# Altium PCB PCB1.PcbDoc
Units mil, origin at the board's own origin, x right, y up, seen from the top; angles counter-clockwise.
Board outline 6000 x 4000 mil, 2 copper layers (Top Layer, Bottom Layer); 76 components, 64 nets, 176 pads, 0 vias.
Unrouted connection lines stored in the file: 99.
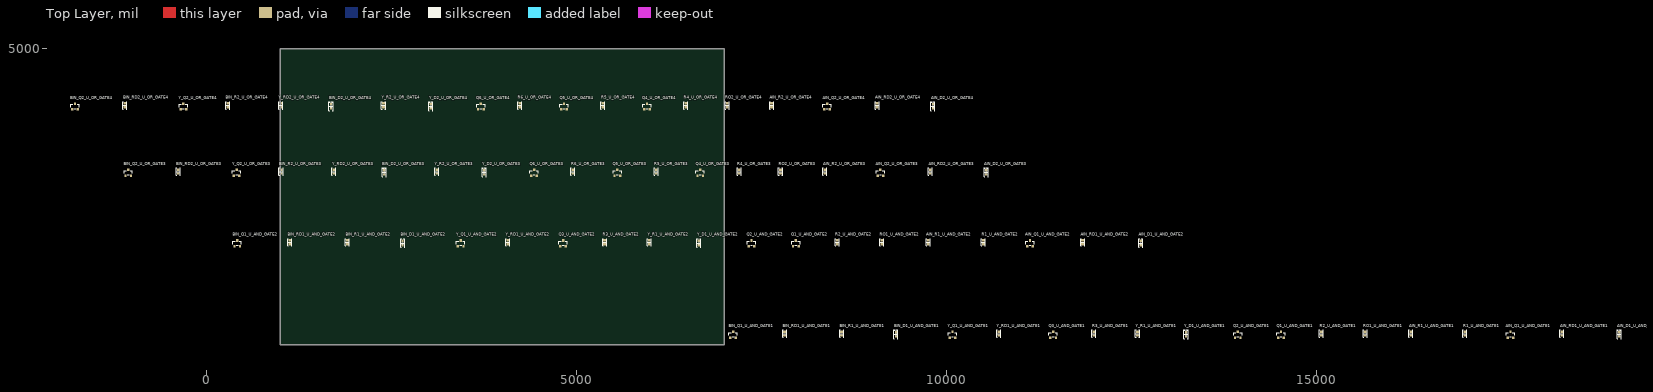
[diagram p0: Top Layer view]
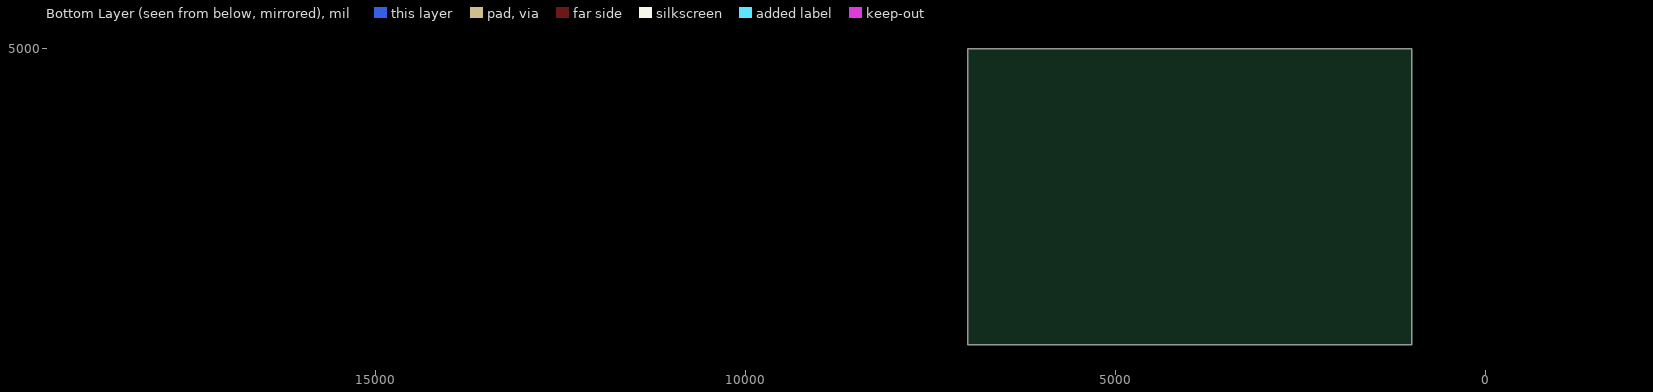
[diagram p1: Bottom Layer view, seen from below]

## Layer stack, top to bottom
Top Solder: solder mask 0.4, Solder Resist, Dk 3.5
Top Layer: signal copper 1.4
Dielectric 1: dielectric 12.6, FR-4, Dk 4.8
Bottom Layer: signal copper 1.4
Bottom Solder: solder mask 0.4, Solder Resist, Dk 3.5

## Board outline
1000,1000 7000,1000 7000,5000 1000,5000

## Design rules (kind name [scope] priority, off if disabled: settings)
Clearance [All] p1: gap=10 ignorepadtopadclearanceinfootprint=FALSE except(0: Arc-Hole Track-Hole SMDPad-Hole THPad-Hole Via-Hole Fill-Hole Poly-Hole Region-Hole Text-Hole)
PolygonConnect [All] p1: connectstyle=Relief reliefconductorwidth=10 reliefentries=4 polygonreliefangle="90 Angle" airgapwidth=10
RoomDefinition U_OR_GATE4 [InComponentClass('U_OR_GATE4')] p1: confinementstyle=ConfineIn formatcopy=TRUE lockcomponents=FALSE outline -1850,4144.53 10460,4144.53 10460,4374.53 -1850,4374.53
RoomDefinition U_OR_GATE3 [InComponentClass('U_OR_GATE3')] p2: confinementstyle=ConfineIn formatcopy=TRUE lockcomponents=FALSE outline -1130,3249.41 11180,3249.41 11180,3479.41 -1130,3479.41
RoomDefinition U_AND_GATE2 [InComponentClass('U_AND_GATE2')] p3: confinementstyle=ConfineIn formatcopy=TRUE lockcomponents=FALSE outline 342.4,2294.37 13297.4,2294.37 13297.4,2524.37 342.4,2524.37
RoomDefinition U_AND_GATE1 [InComponentClass('U_AND_GATE1')] p4: confinementstyle=ConfineIn formatcopy=TRUE lockcomponents=FALSE outline 7045,1060 19755,1060 19755,1290 7045,1290
RoutingVias [All] p1: holewidth=28 width=50 viastyle="Through Hole" minholewidth=28 minwidth=50 maxholewidth=28 maxwidth=50
SolderMaskExpansion [All] p1: expansion=4
Width [All] p1: maxlimit=10 minlimit=10 preferedwidth=10
30 further rules are at their usual default settings.

## Classes and differential pairs
channel class OR_GATE: U_OR_GATE3 U_OR_GATE4
channel class AND_GATE: U_AND_GATE1 U_AND_GATE2
component class U_OR_GATE4: AIN_D2_U_OR_GATE4 AIN_Q2_U_OR_GATE4 AIN_R2_U_OR_GATE4 AIN_RD2_U_OR_GATE4 BIN_D2_U_OR_GATE4 BIN_Q2_U_OR_GATE4 BIN_R2_U_OR_GATE4 BIN_RD2_U_OR_GATE4 Q4_U_OR_GATE4 Q5_U_OR_GATE4 Q6_U_OR_GATE4 R4_U_OR_GATE4 R5_U_OR_GATE4 R6_U_OR_GATE4 RO2_U_OR_GATE4 Y_D2_U_OR_GATE4 Y_Q2_U_OR_GATE4 Y_R2_U_OR_GATE4 Y_RD2_U_OR_GATE4
component class U_OR_GATE3: AIN_D2_U_OR_GATE3 AIN_Q2_U_OR_GATE3 AIN_R2_U_OR_GATE3 AIN_RD2_U_OR_GATE3 BIN_D2_U_OR_GATE3 BIN_Q2_U_OR_GATE3 BIN_R2_U_OR_GATE3 BIN_RD2_U_OR_GATE3 Q4_U_OR_GATE3 Q5_U_OR_GATE3 Q6_U_OR_GATE3 R4_U_OR_GATE3 R5_U_OR_GATE3 R6_U_OR_GATE3 RO2_U_OR_GATE3 Y_D2_U_OR_GATE3 Y_Q2_U_OR_GATE3 Y_R2_U_OR_GATE3 Y_RD2_U_OR_GATE3
component class U_AND_GATE2: AIN_D1_U_AND_GATE2 AIN_Q1_U_AND_GATE2 AIN_R1_U_AND_GATE2 AIN_RD1_U_AND_GATE2 BIN_D1_U_AND_GATE2 BIN_Q1_U_AND_GATE2 BIN_R1_U_AND_GATE2 BIN_RD1_U_AND_GATE2 Q1_U_AND_GATE2 Q2_U_AND_GATE2 Q3_U_AND_GATE2 R1_U_AND_GATE2 R2_U_AND_GATE2 R3_U_AND_GATE2 RO1_U_AND_GATE2 Y_D1_U_AND_GATE2 Y_Q1_U_AND_GATE2 Y_R1_U_AND_GATE2 Y_RD1_U_AND_GATE2
component class U_AND_GATE1: AIN_D1_U_AND_GATE1 AIN_Q1_U_AND_GATE1 AIN_R1_U_AND_GATE1 AIN_RD1_U_AND_GATE1 BIN_D1_U_AND_GATE1 BIN_Q1_U_AND_GATE1 BIN_R1_U_AND_GATE1 BIN_RD1_U_AND_GATE1 Q1_U_AND_GATE1 Q2_U_AND_GATE1 Q3_U_AND_GATE1 R1_U_AND_GATE1 R2_U_AND_GATE1 R3_U_AND_GATE1 RO1_U_AND_GATE1 Y_D1_U_AND_GATE1 Y_Q1_U_AND_GATE1 Y_R1_U_AND_GATE1 Y_RD1_U_AND_GATE1

## Components (designator, comment, footprint, x,y, rotation, side; value= is the part's Value field where it differs from the comment)
AIN_D1_U_AND_GATE1 "Blue" "LED 0603_1608 BLUE" 19095,1140 r90 top (schematic designator AIN_D1)
AIN_D1_U_AND_GATE2 "Blue" "LED 0603_1608 BLUE" 12627.4,2374.37 r90 top (schematic designator AIN_D1)
AIN_D2_U_OR_GATE3 "Blue" "LED 0603_1608 BLUE" 10540,3329.41 r90 top (schematic designator AIN_D2)
AIN_D2_U_OR_GATE4 "Blue" "LED 0603_1608 BLUE" 9820,4224.53 r90 top (schematic designator AIN_D2)
AIN_Q1_U_AND_GATE1 "#NAME?" "MCCSEMI SOT-23-3" 17625,1135 r90 top (schematic designator AIN_Q1)
AIN_Q1_U_AND_GATE2 "#NAME?" "MCCSEMI SOT-23-3" 11132.4,2369.37 r90 top (schematic designator AIN_Q1)
AIN_Q2_U_OR_GATE3 "#NAME?" "MCCSEMI SOT-23-3" 9110,3324.41 r90 top (schematic designator AIN_Q2)
AIN_Q2_U_OR_GATE4 "#NAME?" "MCCSEMI SOT-23-3" 8390,4219.53 r90 top (schematic designator AIN_Q2)
AIN_R1_U_AND_GATE1 "1 kOhms" "RES 0603_1608" 16280,1150 r90 top (schematic designator AIN_R1)
AIN_R1_U_AND_GATE2 "1 kOhms" "RES 0603_1608" 9757.4,2384.37 r90 top (schematic designator AIN_R1)
AIN_R2_U_OR_GATE3 "1 kOhms" "RES 0603_1608" 8360,3339.41 r90 top (schematic designator AIN_R2)
AIN_R2_U_OR_GATE4 "1 kOhms" "RES 0603_1608" 7640,4234.53 r90 top (schematic designator AIN_R2)
AIN_RD1_U_AND_GATE1 "330 Ohms" "RES 0603_1608" 18320,1150 r90 top (schematic designator AIN_RD1)
AIN_RD1_U_AND_GATE2 "330 Ohms" "RES 0603_1608" 11842.4,2384.37 r90 top (schematic designator AIN_RD1)
AIN_RD2_U_OR_GATE3 "330 Ohms" "RES 0603_1608" 9785,3339.41 r90 top (schematic designator AIN_RD2)
AIN_RD2_U_OR_GATE4 "330 Ohms" "RES 0603_1608" 9065,4234.53 r90 top (schematic designator AIN_RD2)
BIN_D1_U_AND_GATE1 "Blue" "LED 0603_1608 BLUE" 9320,1140 r90 top (schematic designator BIN_D1)
BIN_D1_U_AND_GATE2 "Blue" "LED 0603_1608 BLUE" 2652.4,2374.37 r90 top (schematic designator BIN_D1)
BIN_D2_U_OR_GATE3 "Blue" "LED 0603_1608 BLUE" 2405,3329.41 r90 top (schematic designator BIN_D2)
BIN_D2_U_OR_GATE4 "Blue" "LED 0603_1608 BLUE" 1685,4224.53 r90 top (schematic designator BIN_D2)
BIN_Q1_U_AND_GATE1 "#NAME?" "MCCSEMI SOT-23-3" 7120,1135 r90 top (schematic designator BIN_Q1)
BIN_Q1_U_AND_GATE2 "#NAME?" "MCCSEMI SOT-23-3" 417.4,2369.37 r90 top (schematic designator BIN_Q1)
BIN_Q2_U_OR_GATE3 "#NAME?" "MCCSEMI SOT-23-3" -1055,3324.41 r90 top (schematic designator BIN_Q2)
BIN_Q2_U_OR_GATE4 "#NAME?" "MCCSEMI SOT-23-3" -1775,4219.53 r90 top (schematic designator BIN_Q2)
BIN_R1_U_AND_GATE1 "1 kOhms" "RES 0603_1608" 8585,1150 r90 top (schematic designator BIN_R1)
BIN_R1_U_AND_GATE2 "1 kOhms" "RES 0603_1608" 1907.4,2384.37 r90 top (schematic designator BIN_R1)
BIN_R2_U_OR_GATE3 "1 kOhms" "RES 0603_1608" 1010,3339.41 r90 top (schematic designator BIN_R2)
BIN_R2_U_OR_GATE4 "1 kOhms" "RES 0603_1608" 290,4234.53 r90 top (schematic designator BIN_R2)
BIN_RD1_U_AND_GATE1 "330 Ohms" "RES 0603_1608" 7815,1150 r90 top (schematic designator BIN_RD1)
BIN_RD1_U_AND_GATE2 "330 Ohms" "RES 0603_1608" 1127.4,2384.37 r90 top (schematic designator BIN_RD1)
BIN_RD2_U_OR_GATE3 "330 Ohms" "RES 0603_1608" -380,3339.41 r90 top (schematic designator BIN_RD2)
BIN_RD2_U_OR_GATE4 "330 Ohms" "RES 0603_1608" -1100,4234.53 r90 top (schematic designator BIN_RD2)
Q1_U_AND_GATE1 "#NAME?" "MCCSEMI SOT-23-3" 14525,1135 r90 top (schematic designator Q1)
Q1_U_AND_GATE2 "#NAME?" "MCCSEMI SOT-23-3" 7967.4,2369.37 r90 top (schematic designator Q1)
Q2_U_AND_GATE1 "#NAME?" "MCCSEMI SOT-23-3" 13940,1135 r90 top (schematic designator Q2)
Q2_U_AND_GATE2 "#NAME?" "MCCSEMI SOT-23-3" 7367.4,2369.37 r90 top (schematic designator Q2)
Q3_U_AND_GATE1 "#NAME?" "MCCSEMI SOT-23-3" 11445,1135 r90 top (schematic designator Q3)
Q3_U_AND_GATE2 "#NAME?" "MCCSEMI SOT-23-3" 4822.4,2369.37 r90 top (schematic designator Q3)
Q4_U_OR_GATE3 "#NAME?" "MCCSEMI SOT-23-3" 6675,3324.41 r90 top (schematic designator Q4)
Q4_U_OR_GATE4 "#NAME?" "MCCSEMI SOT-23-3" 5955,4219.53 r90 top (schematic designator Q4)
Q5_U_OR_GATE3 "#NAME?" "MCCSEMI SOT-23-3" 5555,3324.41 r90 top (schematic designator Q5)
Q5_U_OR_GATE4 "#NAME?" "MCCSEMI SOT-23-3" 4835,4219.53 r90 top (schematic designator Q5)
Q6_U_OR_GATE3 "#NAME?" "MCCSEMI SOT-23-3" 4430,3324.41 r90 top (schematic designator Q6)
Q6_U_OR_GATE4 "#NAME?" "MCCSEMI SOT-23-3" 3710,4219.53 r90 top (schematic designator Q6)
R1_U_AND_GATE1 "1 kOhms" "RES 0603_1608" 17010,1150 r90 top (schematic designator R1)
R1_U_AND_GATE2 "1 kOhms" "RES 0603_1608" 10502.4,2384.37 r90 top (schematic designator R1)
R2_U_AND_GATE1 "1 kOhms" "RES 0603_1608" 15070,1150 r90 top (schematic designator R2)
R2_U_AND_GATE2 "1 kOhms" "RES 0603_1608" 8527.4,2384.37 r90 top (schematic designator R2)
R3_U_AND_GATE1 "1 kOhms" "RES 0603_1608" 11995,1150 r90 top (schematic designator R3)
R3_U_AND_GATE2 "1 kOhms" "RES 0603_1608" 5382.4,2384.37 r90 top (schematic designator R3)
R4_U_OR_GATE3 "1 kOhms" "RES 0603_1608" 7200,3339.41 r90 top (schematic designator R4)
R4_U_OR_GATE4 "1 kOhms" "RES 0603_1608" 6480,4234.53 r90 top (schematic designator R4)
R5_U_OR_GATE3 "1 kOhms" "RES 0603_1608" 6080,3339.41 r90 top (schematic designator R5)
R5_U_OR_GATE4 "1 kOhms" "RES 0603_1608" 5360,4234.53 r90 top (schematic designator R5)
R6_U_OR_GATE3 "1 kOhms" "RES 0603_1608" 4955,3339.41 r90 top (schematic designator R6)
R6_U_OR_GATE4 "1 kOhms" "RES 0603_1608" 4235,4234.53 r90 top (schematic designator R6)
RO1_U_AND_GATE1 "220 Ohms" "RES 0603_1608" 15660,1150 r90 top (schematic designator RO1)
RO1_U_AND_GATE2 "220 Ohms" "RES 0603_1608" 9127.4,2384.37 r90 top (schematic designator RO1)
RO2_U_OR_GATE3 "220 Ohms" "RES 0603_1608" 7760,3339.41 r90 top (schematic designator RO2)
RO2_U_OR_GATE4 "220 Ohms" "RES 0603_1608" 7040,4234.53 r90 top (schematic designator RO2)
Y_D1_U_AND_GATE1 "Red" "LED 0603_1608 RED" 13240,1140 r90 top (schematic designator Y_D1)
Y_D1_U_AND_GATE2 "Red" "LED 0603_1608 RED" 6657.4,2374.37 r90 top (schematic designator Y_D1)
Y_D2_U_OR_GATE3 "Red" "LED 0603_1608 RED" 3755,3329.41 r90 top (schematic designator Y_D2)
Y_D2_U_OR_GATE4 "Red" "LED 0603_1608 RED" 3035,4224.53 r90 top (schematic designator Y_D2)
Y_Q1_U_AND_GATE1 "#NAME?" "MCCSEMI SOT-23-3" 10085,1135 r90 top (schematic designator Y_Q1)
Y_Q1_U_AND_GATE2 "#NAME?" "MCCSEMI SOT-23-3" 3437.4,2369.37 r90 top (schematic designator Y_Q1)
Y_Q2_U_OR_GATE3 "#NAME?" "MCCSEMI SOT-23-3" 410,3324.41 r90 top (schematic designator Y_Q2)
Y_Q2_U_OR_GATE4 "#NAME?" "MCCSEMI SOT-23-3" -310,4219.53 r90 top (schematic designator Y_Q2)
Y_R1_U_AND_GATE1 "1 kOhms" "RES 0603_1608" 12585,1150 r90 top (schematic designator Y_R1)
Y_R1_U_AND_GATE2 "1 kOhms" "RES 0603_1608" 5987.4,2384.37 r90 top (schematic designator Y_R1)
Y_R2_U_OR_GATE3 "1 kOhms" "RES 0603_1608" 3115,3339.41 r90 top (schematic designator Y_R2)
Y_R2_U_OR_GATE4 "1 kOhms" "RES 0603_1608" 2395,4234.53 r90 top (schematic designator Y_R2)
Y_RD1_U_AND_GATE1 "330 Ohms" "RES 0603_1608" 10710,1150 r90 top (schematic designator Y_RD1)
Y_RD1_U_AND_GATE2 "330 Ohms" "RES 0603_1608" 4072.4,2384.37 r90 top (schematic designator Y_RD1)
Y_RD2_U_OR_GATE3 "330 Ohms" "RES 0603_1608" 1725,3339.41 r90 top (schematic designator Y_RD2)
Y_RD2_U_OR_GATE4 "330 Ohms" "RES 0603_1608" 1005,4234.53 r90 top (schematic designator Y_RD2)

## Footprints (in the part's own frame and the unit in brackets; to place one, negate y for a bottom-side part, rotate by r counter-clockwise, add the part's x,y. Pads: shape width x height; smd on the part's side, far side on the other; paste and mask are expansions set on the pad)
"LED 0603_1608 BLUE" [mm] "Chip Diode, 2-Leads, Body 1.60x0.80mm, IPC Medium Density"
  rect 0.8x0.8 smd: 1(-0.75,0) 2(0.75,0)
  silkscreen extent -1.52,-0.7 1.52,0.7, body extent -0.8,-0.4 0.8,0.4, height 0.53
"LED 0603_1608 RED" [mm] "Chip Diode, 2-Leads, Body 1.60x0.80mm, IPC Medium Density"
  rect 0.8x0.8 smd: 1(-0.75,0) 2(0.75,0)
  silkscreen extent -1.52,-0.7 1.52,0.7, body extent -0.8,-0.4 0.8,0.4, height 0.53
"MCCSEMI SOT-23-3" [mm] "SOT23, 3-Leads, Body 2.92x2.37mm, Pitch 0.95mm, IPC Medium Density"
  rect 0.9x0.8 smd: 1(-1,0.95) 2(-1,-0.95) 3(1,0)
  silkscreen extent -0.7,-1.45 0.7,1.45, body extent -1.16,-1.45 1.16,1.45, height 1.5
"RES 0603_1608" [mm] "Chip Resistor, 2-Leads, Body 1.60x0.80mm, IPC Medium Density"
  rect 0.85x0.95 smd: 1(-0.65,0) 2(0.65,0)
  silkscreen extent -1.27,-0.7 1.27,0.7, body extent -0.8,-0.4 0.8,0.4, height 0.45

## Part data
AIN_D1_U_AND_GATE1 AIN_D1_U_AND_GATE2 AIN_D2_U_OR_GATE3 AIN_D2_U_OR_GATE4 BIN_D1_U_AND_GATE1 BIN_D1_U_AND_GATE2 BIN_D2_U_OR_GATE3 BIN_D2_U_OR_GATE4: library part IN-S63AT5B, "LED BLUE CLEAR 0603 SMD", Current - Test=5mA, Device Package="0603 (1608 Metric)", Lens Color=Clear, Manufacturer=Inolux, Millicandela Rating=45mcd, Supplier Device Package=0603, Supplier Part Number 1=1830-1061-1-ND, Voltage - Forward (Vf) (Typ)=2.8V, Color=Blue, ComponentLink1Description=Datasheet, ComponentLink1URL=http://www.inolux-corp.com/datasheet/SMDLED/Mono%20Color%20Top%20View/IN-S63AT%20Series_V1.1.pdf, ComponentLink2Description="DigiKey Link", ComponentLink2URL=https://www.digikey.com/en/products/detail/inolux/IN-S63AT5B/7604929, Configuration=Standard, Height (Max)=0.40mm, LastUpdated="6/3/2024 7:57:52 PM", Lens Size="1.15mm x 0.80mm", Lens Style="Rectangle with Flat Top", Lens Transparency=Clear, Lifecycle Status=Active, Minimum Order=1, Mounting Type="Surface Mount", Package / Case="0603 (1608 Metric)", Packaging=TapeAndReel, PartId=834, Part Number=IN-S63AT5B, Part Status=Active, Price=0.03, Series=IN-S63AT, Size / Dimension="1.60mm L x 0.80mm W", Supplier 1=DigiKey, Viewing Angle=120°, Wavelength - Dominant=470nm, Wavelength - Peak=468nm
AIN_Q1_U_AND_GATE1 AIN_Q1_U_AND_GATE2 AIN_Q2_U_OR_GATE3 AIN_Q2_U_OR_GATE4 BIN_Q1_U_AND_GATE1 BIN_Q1_U_AND_GATE2 BIN_Q2_U_OR_GATE3 BIN_Q2_U_OR_GATE4 Q1_U_AND_GATE1 Q1_U_AND_GATE2 Q2_U_AND_GATE1 Q2_U_AND_GATE2 Q3_U_AND_GATE1 Q3_U_AND_GATE2 Q4_U_OR_GATE3 Q4_U_OR_GATE4 Q5_U_OR_GATE3 Q5_U_OR_GATE4 Q6_U_OR_GATE3 Q6_U_OR_GATE4 Y_Q1_U_AND_GATE1 Y_Q1_U_AND_GATE2 Y_Q2_U_OR_GATE3 Y_Q2_U_OR_GATE4: library part MMSS8050-L-TP, "TRANS NPN 25V 1.5A SOT23", Current - Collector (Ic) (Max)="1.5 A", Current - Collector Cutoff (Max)=100nA, DC Current Gain (hFE) (Min) @ Ic, Vce="120 @ 100mA, 1V", Frequency - Transition=100MHz, Manufacturer="Micro Commercial Co", Operating Temperature="-55°C ~ 150°C (TJ)", Package / Case="TO-236-3, SC-59, SOT-23-3", Power - Max="625 mW", Supplier Device Package=SOT-23, Supplier Part Number 1=MMSS8050-L-TPMSCT-ND, Voltage - Collector Emitter Breakdown (Max)="25 V", ComponentLink1Description=Datasheet, ComponentLink1URL=https://www.mccsemi.com/pdf/Products/MMSS8050(SOT-23).pdf, ComponentLink2Description="DigiKey Link", ComponentLink2URL=https://www.digikey.com/en/products/detail/micro-commercial-co/MMSS8050-L-TP/2827197, LastUpdated="6/3/2024 8:24:16 PM", Lifecycle Status=Active, Minimum Order=1, Mounting Type="Surface Mount", Packaging=TapeAndReel, PartId=278, Part Number=MMSS8050-L-TP, Part Status=Active, Price=0.01, Series=-, Supplier 1=DigiKey, Transistor Type=NPN, Vce Saturation (Max) @ Ib, Ic="500mV @ 80mA, 800mA"
AIN_R1_U_AND_GATE1 AIN_R1_U_AND_GATE2 AIN_R2_U_OR_GATE3 AIN_R2_U_OR_GATE4 BIN_R1_U_AND_GATE1 BIN_R1_U_AND_GATE2 BIN_R2_U_OR_GATE3 BIN_R2_U_OR_GATE4 R1_U_AND_GATE1 R1_U_AND_GATE2 R2_U_AND_GATE1 R2_U_AND_GATE2 R3_U_AND_GATE1 R3_U_AND_GATE2 R4_U_OR_GATE3 R4_U_OR_GATE4 R5_U_OR_GATE3 R5_U_OR_GATE4 R6_U_OR_GATE3 R6_U_OR_GATE4 Y_R1_U_AND_GATE1 Y_R1_U_AND_GATE2 Y_R2_U_OR_GATE3 Y_R2_U_OR_GATE4: library part CPF0603B1K0E, "RES SMD 1K OHM 0.1% 1/16W 0603", Device Package="0603 (1608 Metric)", Manufacturer="TE Connectivity Passive Product", Operating Temperature="-55°C ~ 155°C", Power (Watts)="0.063W, 1/16W", Supplier Device Package=0603, Supplier Part Number 1=A119887CT-ND, Temperature Coefficient=±25ppm/°C, Tolerance=±0.1%, ComponentLink1Description=Datasheet, ComponentLink1URL=https://www.te.com/commerce/DocumentDelivery/DDEController?Action=srchrtrv&DocNm=1773200&DocType=DS&DocLang=English, ComponentLink2Description="DigiKey Link", ComponentLink2URL=https://www.digikey.com/en/products/detail/te-connectivity-passive-product/CPF0603B1K0E/2390473, Composition="Thin Film", Height - Seated (Max)="0.022\" (0.55mm)", LastUpdated="2/9/2024 8:43:37 PM", Lifecycle Status=Active, Minimum Order=1, Number of Terminations=2, Package / Case="0603 (1608 Metric)", Packaging=TapeAndReel, PartId=4877, Part Number=CPF0603B1K0E, Part Status=Active, Price=0.09, Resistance="1 kOhms", Series="CPF, Neohm", Size / Dimension="0.061\" L x 0.031\" W (1.55mm x 0.80mm)", Supplier 1=DigiKey
AIN_RD1_U_AND_GATE1 AIN_RD1_U_AND_GATE2 AIN_RD2_U_OR_GATE3 AIN_RD2_U_OR_GATE4 BIN_RD1_U_AND_GATE1 BIN_RD1_U_AND_GATE2 BIN_RD2_U_OR_GATE3 BIN_RD2_U_OR_GATE4 Y_RD1_U_AND_GATE1 Y_RD1_U_AND_GATE2 Y_RD2_U_OR_GATE3 Y_RD2_U_OR_GATE4: library part RMCF0603JT330R, "RES 330 OHM 5% 1/10W 0603", Device Package="0603 (1608 Metric)", Manufacturer="Stackpole Electronics Inc", Operating Temperature="-55°C ~ 155°C", Power (Watts)="0.1W, 1/10W", Ratings=AEC-Q200, Supplier Device Package=0603, Supplier Part Number 1=RMCF0603JT330RCT-ND, Temperature Coefficient=±200ppm/°C, Tolerance=±5%, ComponentLink1Description=Datasheet, ComponentLink1URL=https://www.seielect.com/catalog/sei-rmcf_rmcp.pdf, ComponentLink2Description="DigiKey Link", ComponentLink2URL=https://www.digikey.com/en/products/detail/stackpole-electronics-inc/RMCF0603JT330R/1757998, Composition="Thick Film", Features="Automotive AEC-Q200", Height - Seated (Max)="0.022\" (0.55mm)", LastUpdated="2/9/2024 8:43:33 PM", Lifecycle Status=Active, Minimum Order=1, Number of Terminations=2, Package / Case="0603 (1608 Metric)", Packaging=CutTape, PartId=5841, Part Number=RMCF0603JT330R, Part Status=Active, Price=0.01, Resistance="330 Ohms", Series=RMCF, Size / Dimension="0.061\" L x 0.031\" W (1.55mm x 0.80mm)", Supplier 1=DigiKey
RO1_U_AND_GATE1 RO1_U_AND_GATE2 RO2_U_OR_GATE3 RO2_U_OR_GATE4: library part ERA-3AED221V, "RES SMD 220 OHM 0.5% 1/10W 0603", Device Package="0603 (1608 Metric)", Manufacturer="Panasonic Electronic Components", Operating Temperature="-55°C ~ 155°C", Power (Watts)="0.1W, 1/10W", Ratings=AEC-Q200, Supplier Device Package=0603, Supplier Part Number 1=P123752CT-ND, Temperature Coefficient=±25ppm/°C, Tolerance=±0.5%, ComponentLink1Description=Datasheet, ComponentLink1URL=https://industrial.panasonic.com/cdbs/www-data/pdf/RDM0000/AOA0000C307.pdf, ComponentLink2Description="DigiKey Link", ComponentLink2URL=https://www.digikey.com/en/products/detail/panasonic-electronic-components/ERA-3AED221V/9373509, Composition="Thin Film", Features="Automotive AEC-Q200", Height - Seated (Max)="0.022\" (0.55mm)", LastUpdated="2/9/2024 8:43:36 PM", Lifecycle Status=Active, Minimum Order=1, Number of Terminations=2, Package / Case="0603 (1608 Metric)", Packaging=TapeAndReel, PartId=4952, Part Number=ERA-3AED221V, Part Status=Active, Price=0.03, Resistance="220 Ohms", Series=ERA-3A, Size / Dimension="0.063\" L x 0.031\" W (1.60mm x 0.80mm)", Supplier 1=DigiKey
Y_D1_U_AND_GATE1 Y_D1_U_AND_GATE2 Y_D2_U_OR_GATE3 Y_D2_U_OR_GATE4: library part XZMDK53W-8, "LED RED CLEAR CHIP SMD", Current - Test=20mA, Device Package="0603 (1608 Metric)", Lens Color=Colorless, Manufacturer=SunLED, Millicandela Rating=248mcd, Supplier Device Package="Chip LED", Supplier Part Number 1=1497-1169-6-ND, Voltage - Forward (Vf) (Typ)=1.95V, Color=Red, ComponentLink1Description=Datasheet, ComponentLink1URL=https://www.sunledusa.com/products/spec/XZMDK53W-8.pdf, ComponentLink2Description="DigiKey Link", ComponentLink2URL=https://www.digikey.com/en/products/detail/sunled/XZMDK53W-8/4745952, Configuration=Standard, Height (Max)=0.95mm, LastUpdated="6/3/2024 7:59:48 PM", Lens Size="0.35mm Dia", Lens Style="Round with Domed Top", Lens Transparency=Clear, Lifecycle Status=Active, Minimum Order=1, Mounting Type="Surface Mount", Package / Case="0603 (1608 Metric)", Packaging=TapeAndReel, PartId=401, Part Number=XZMDK53W-8, Part Status=Active, Price=0.06, Series=PixsoLED, Size / Dimension="1.60mm L x 0.80mm W", Supplier 1=DigiKey, Viewing Angle=60°, Wavelength - Dominant=630nm, Wavelength - Peak=645nm

## Nets (pads, with @x,y where several pads share a name; then routed paths per layer and width w, separated by ;. In a path a pad name is that pad's centre, name@x,y a point inside that pad or via, vN(x,y) a via of type N, cw(c..) or ccw(c..) an arc to the next point about the centre after c; other vN are vias at no path point)
+5: AIN_RD1_U_AND_GATE1.1 AIN_RD1_U_AND_GATE2.1 AIN_RD2_U_OR_GATE3.1 AIN_RD2_U_OR_GATE4.1 BIN_RD1_U_AND_GATE1.1 BIN_RD1_U_AND_GATE2.1 BIN_RD2_U_OR_GATE3.1 BIN_RD2_U_OR_GATE4.1 R1_U_AND_GATE1.2 R1_U_AND_GATE2.2 R5_U_OR_GATE3.2 R5_U_OR_GATE4.2 RO1_U_AND_GATE1.2 RO1_U_AND_GATE2.2 RO2_U_OR_GATE3.2 RO2_U_OR_GATE4.2 Y_RD1_U_AND_GATE1.1 Y_RD1_U_AND_GATE2.1 Y_RD2_U_OR_GATE3.1 Y_RD2_U_OR_GATE4.1
GND: AIN_Q1_U_AND_GATE1.2 AIN_Q1_U_AND_GATE2.2 AIN_Q2_U_OR_GATE3.2 AIN_Q2_U_OR_GATE4.2 BIN_Q1_U_AND_GATE1.2 BIN_Q1_U_AND_GATE2.2 BIN_Q2_U_OR_GATE3.2 BIN_Q2_U_OR_GATE4.2 Q2_U_AND_GATE1.2 Q2_U_AND_GATE2.2 Q3_U_AND_GATE1.2 Q3_U_AND_GATE2.2 Q4_U_OR_GATE3.2 Q4_U_OR_GATE4.2 Q5_U_OR_GATE3.2 Q5_U_OR_GATE4.2 Q6_U_OR_GATE3.2 Q6_U_OR_GATE4.2 Y_Q1_U_AND_GATE1.2 Y_Q1_U_AND_GATE2.2 Y_Q2_U_OR_GATE3.2 Y_Q2_U_OR_GATE4.2
NetAIN_D1_U_AND_GATE1_1: AIN_D1_U_AND_GATE1.1 AIN_RD1_U_AND_GATE1.2
NetAIN_D1_U_AND_GATE1_2: AIN_D1_U_AND_GATE1.2 AIN_Q1_U_AND_GATE1.3
NetAIN_D1_U_AND_GATE2_1: AIN_D1_U_AND_GATE2.1 AIN_RD1_U_AND_GATE2.2
NetAIN_D1_U_AND_GATE2_2: AIN_D1_U_AND_GATE2.2 AIN_Q1_U_AND_GATE2.3
NetAIN_D2_U_OR_GATE3_1: AIN_D2_U_OR_GATE3.1 AIN_RD2_U_OR_GATE3.2
NetAIN_D2_U_OR_GATE3_2: AIN_D2_U_OR_GATE3.2 AIN_Q2_U_OR_GATE3.3
NetAIN_D2_U_OR_GATE4_1: AIN_D2_U_OR_GATE4.1 AIN_RD2_U_OR_GATE4.2
NetAIN_D2_U_OR_GATE4_2: AIN_D2_U_OR_GATE4.2 AIN_Q2_U_OR_GATE4.3
NetAIN_Q1_U_AND_GATE1_1: AIN_Q1_U_AND_GATE1.1 AIN_R1_U_AND_GATE1.1
NetAIN_Q1_U_AND_GATE2_1: AIN_Q1_U_AND_GATE2.1 AIN_R1_U_AND_GATE2.1
NetAIN_Q2_U_OR_GATE3_1: AIN_Q2_U_OR_GATE3.1 AIN_R2_U_OR_GATE3.1
NetAIN_Q2_U_OR_GATE4_1: AIN_Q2_U_OR_GATE4.1 AIN_R2_U_OR_GATE4.1
NetBIN_D1_U_AND_GATE1_1: BIN_D1_U_AND_GATE1.1 BIN_RD1_U_AND_GATE1.2
NetBIN_D1_U_AND_GATE1_2: BIN_D1_U_AND_GATE1.2 BIN_Q1_U_AND_GATE1.3
NetBIN_D1_U_AND_GATE2_1: BIN_D1_U_AND_GATE2.1 BIN_RD1_U_AND_GATE2.2
NetBIN_D1_U_AND_GATE2_2: BIN_D1_U_AND_GATE2.2 BIN_Q1_U_AND_GATE2.3
NetBIN_D2_U_OR_GATE3_1: BIN_D2_U_OR_GATE3.1 BIN_RD2_U_OR_GATE3.2
NetBIN_D2_U_OR_GATE3_2: BIN_D2_U_OR_GATE3.2 BIN_Q2_U_OR_GATE3.3
NetBIN_D2_U_OR_GATE4_1: BIN_D2_U_OR_GATE4.1 BIN_RD2_U_OR_GATE4.2
NetBIN_D2_U_OR_GATE4_2: BIN_D2_U_OR_GATE4.2 BIN_Q2_U_OR_GATE4.3
NetBIN_Q1_U_AND_GATE1_1: BIN_Q1_U_AND_GATE1.1 BIN_R1_U_AND_GATE1.1
NetBIN_Q1_U_AND_GATE2_1: BIN_Q1_U_AND_GATE2.1 BIN_R1_U_AND_GATE2.1
NetBIN_Q2_U_OR_GATE3_1: BIN_Q2_U_OR_GATE3.1 BIN_R2_U_OR_GATE3.1
NetBIN_Q2_U_OR_GATE4_1: BIN_Q2_U_OR_GATE4.1 BIN_R2_U_OR_GATE4.1
NetLabel6_3: AIN_R1_U_AND_GATE1.2 R2_U_AND_GATE1.1
NetLabel7_3: BIN_R1_U_AND_GATE1.2 R3_U_AND_GATE1.1
NetLabel8_3: AIN_R1_U_AND_GATE2.2 R2_U_AND_GATE2.1
NetLabel9_3: BIN_R1_U_AND_GATE2.2 R3_U_AND_GATE2.1
NetLabel10_3: AIN_R2_U_OR_GATE3.2 R4_U_OR_GATE3.1
NetLabel11_3: BIN_R2_U_OR_GATE3.2 R6_U_OR_GATE3.1
NetLabel12_3: AIN_R2_U_OR_GATE4.2 R4_U_OR_GATE4.1
NetLabel13_3: BIN_R2_U_OR_GATE4.2 R6_U_OR_GATE4.1
NetQ1_U_AND_GATE1_1: Q1_U_AND_GATE1.1 R2_U_AND_GATE1.2
NetQ1_U_AND_GATE1_2: Q1_U_AND_GATE1.2 Q3_U_AND_GATE1.3
NetQ1_U_AND_GATE1_3: Q1_U_AND_GATE1.3 Q2_U_AND_GATE1.1 R1_U_AND_GATE1.1
NetQ1_U_AND_GATE2_1: Q1_U_AND_GATE2.1 R2_U_AND_GATE2.2
NetQ1_U_AND_GATE2_2: Q1_U_AND_GATE2.2 Q3_U_AND_GATE2.3
NetQ1_U_AND_GATE2_3: Q1_U_AND_GATE2.3 Q2_U_AND_GATE2.1 R1_U_AND_GATE2.1
NetQ3_U_AND_GATE1_1: Q3_U_AND_GATE1.1 R3_U_AND_GATE1.2
NetQ3_U_AND_GATE2_1: Q3_U_AND_GATE2.1 R3_U_AND_GATE2.2
NetQ4_U_OR_GATE3_1: Q4_U_OR_GATE3.1 R4_U_OR_GATE3.2
NetQ4_U_OR_GATE3_3: Q4_U_OR_GATE3.3 Q5_U_OR_GATE3.1 Q6_U_OR_GATE3.3 R5_U_OR_GATE3.1
NetQ4_U_OR_GATE4_1: Q4_U_OR_GATE4.1 R4_U_OR_GATE4.2
NetQ4_U_OR_GATE4_3: Q4_U_OR_GATE4.3 Q5_U_OR_GATE4.1 Q6_U_OR_GATE4.3 R5_U_OR_GATE4.1
NetQ6_U_OR_GATE3_1: Q6_U_OR_GATE3.1 R6_U_OR_GATE3.2
NetQ6_U_OR_GATE4_1: Q6_U_OR_GATE4.1 R6_U_OR_GATE4.2
NetY_D1_U_AND_GATE1_1: Y_D1_U_AND_GATE1.1 Y_RD1_U_AND_GATE1.2
NetY_D1_U_AND_GATE1_2: Y_D1_U_AND_GATE1.2 Y_Q1_U_AND_GATE1.3
NetY_D1_U_AND_GATE2_1: Y_D1_U_AND_GATE2.1 Y_RD1_U_AND_GATE2.2
NetY_D1_U_AND_GATE2_2: Y_D1_U_AND_GATE2.2 Y_Q1_U_AND_GATE2.3
NetY_D2_U_OR_GATE3_1: Y_D2_U_OR_GATE3.1 Y_RD2_U_OR_GATE3.2
NetY_D2_U_OR_GATE3_2: Y_D2_U_OR_GATE3.2 Y_Q2_U_OR_GATE3.3
NetY_D2_U_OR_GATE4_1: Y_D2_U_OR_GATE4.1 Y_RD2_U_OR_GATE4.2
NetY_D2_U_OR_GATE4_2: Y_D2_U_OR_GATE4.2 Y_Q2_U_OR_GATE4.3
NetY_Q1_U_AND_GATE1_1: Y_Q1_U_AND_GATE1.1 Y_R1_U_AND_GATE1.1
NetY_Q1_U_AND_GATE2_1: Y_Q1_U_AND_GATE2.1 Y_R1_U_AND_GATE2.1
NetY_Q2_U_OR_GATE3_1: Y_Q2_U_OR_GATE3.1 Y_R2_U_OR_GATE3.1
NetY_Q2_U_OR_GATE4_1: Y_Q2_U_OR_GATE4.1 Y_R2_U_OR_GATE4.1
Y_U_AND_GATE1: Q2_U_AND_GATE1.3 RO1_U_AND_GATE1.1 Y_R1_U_AND_GATE1.2
Y_U_AND_GATE2: Q2_U_AND_GATE2.3 RO1_U_AND_GATE2.1 Y_R1_U_AND_GATE2.2
Y_U_OR_GATE3: Q5_U_OR_GATE3.3 RO2_U_OR_GATE3.1 Y_R2_U_OR_GATE3.2
Y_U_OR_GATE4: Q5_U_OR_GATE4.3 RO2_U_OR_GATE4.1 Y_R2_U_OR_GATE4.2